# Altium PCB 10-DigitalToAnalogConvert.PcbDoc
Units mm, origin at the board's own origin, x right, y up, seen from the top; angles counter-clockwise.
Board outline 40 x 40 mm, 4 copper layers (Top Layer, Internal Plane 1, Internal Plane 2, Bottom Layer), stack 0.462 mm thick; 33 components, 33 nets, 108 pads, 16 vias.
Unrouted connection lines stored in the file: 62.
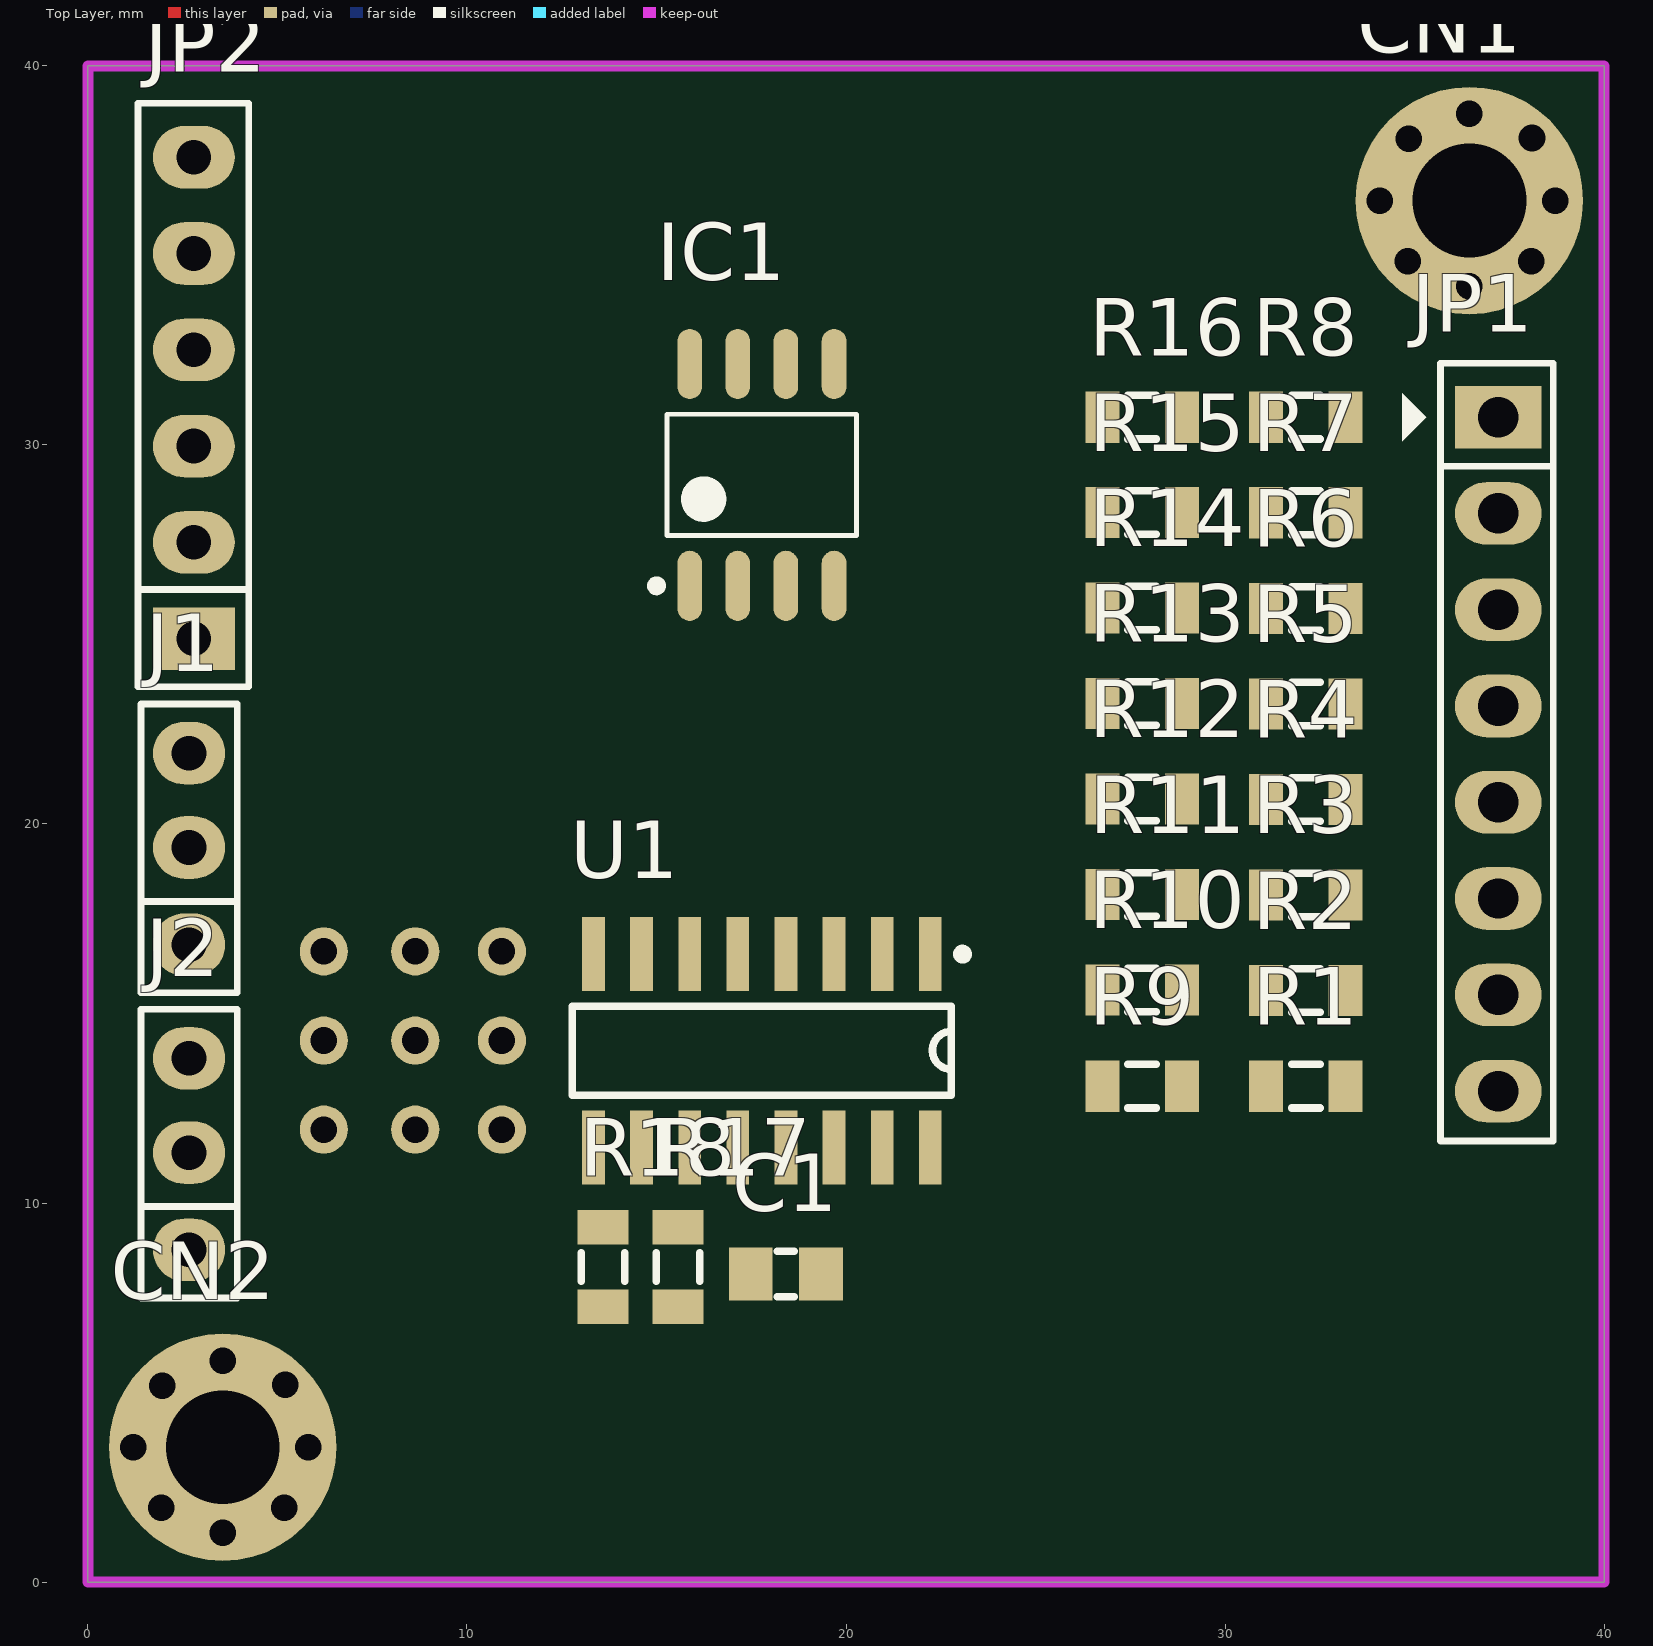
[diagram p0: Top Layer view]
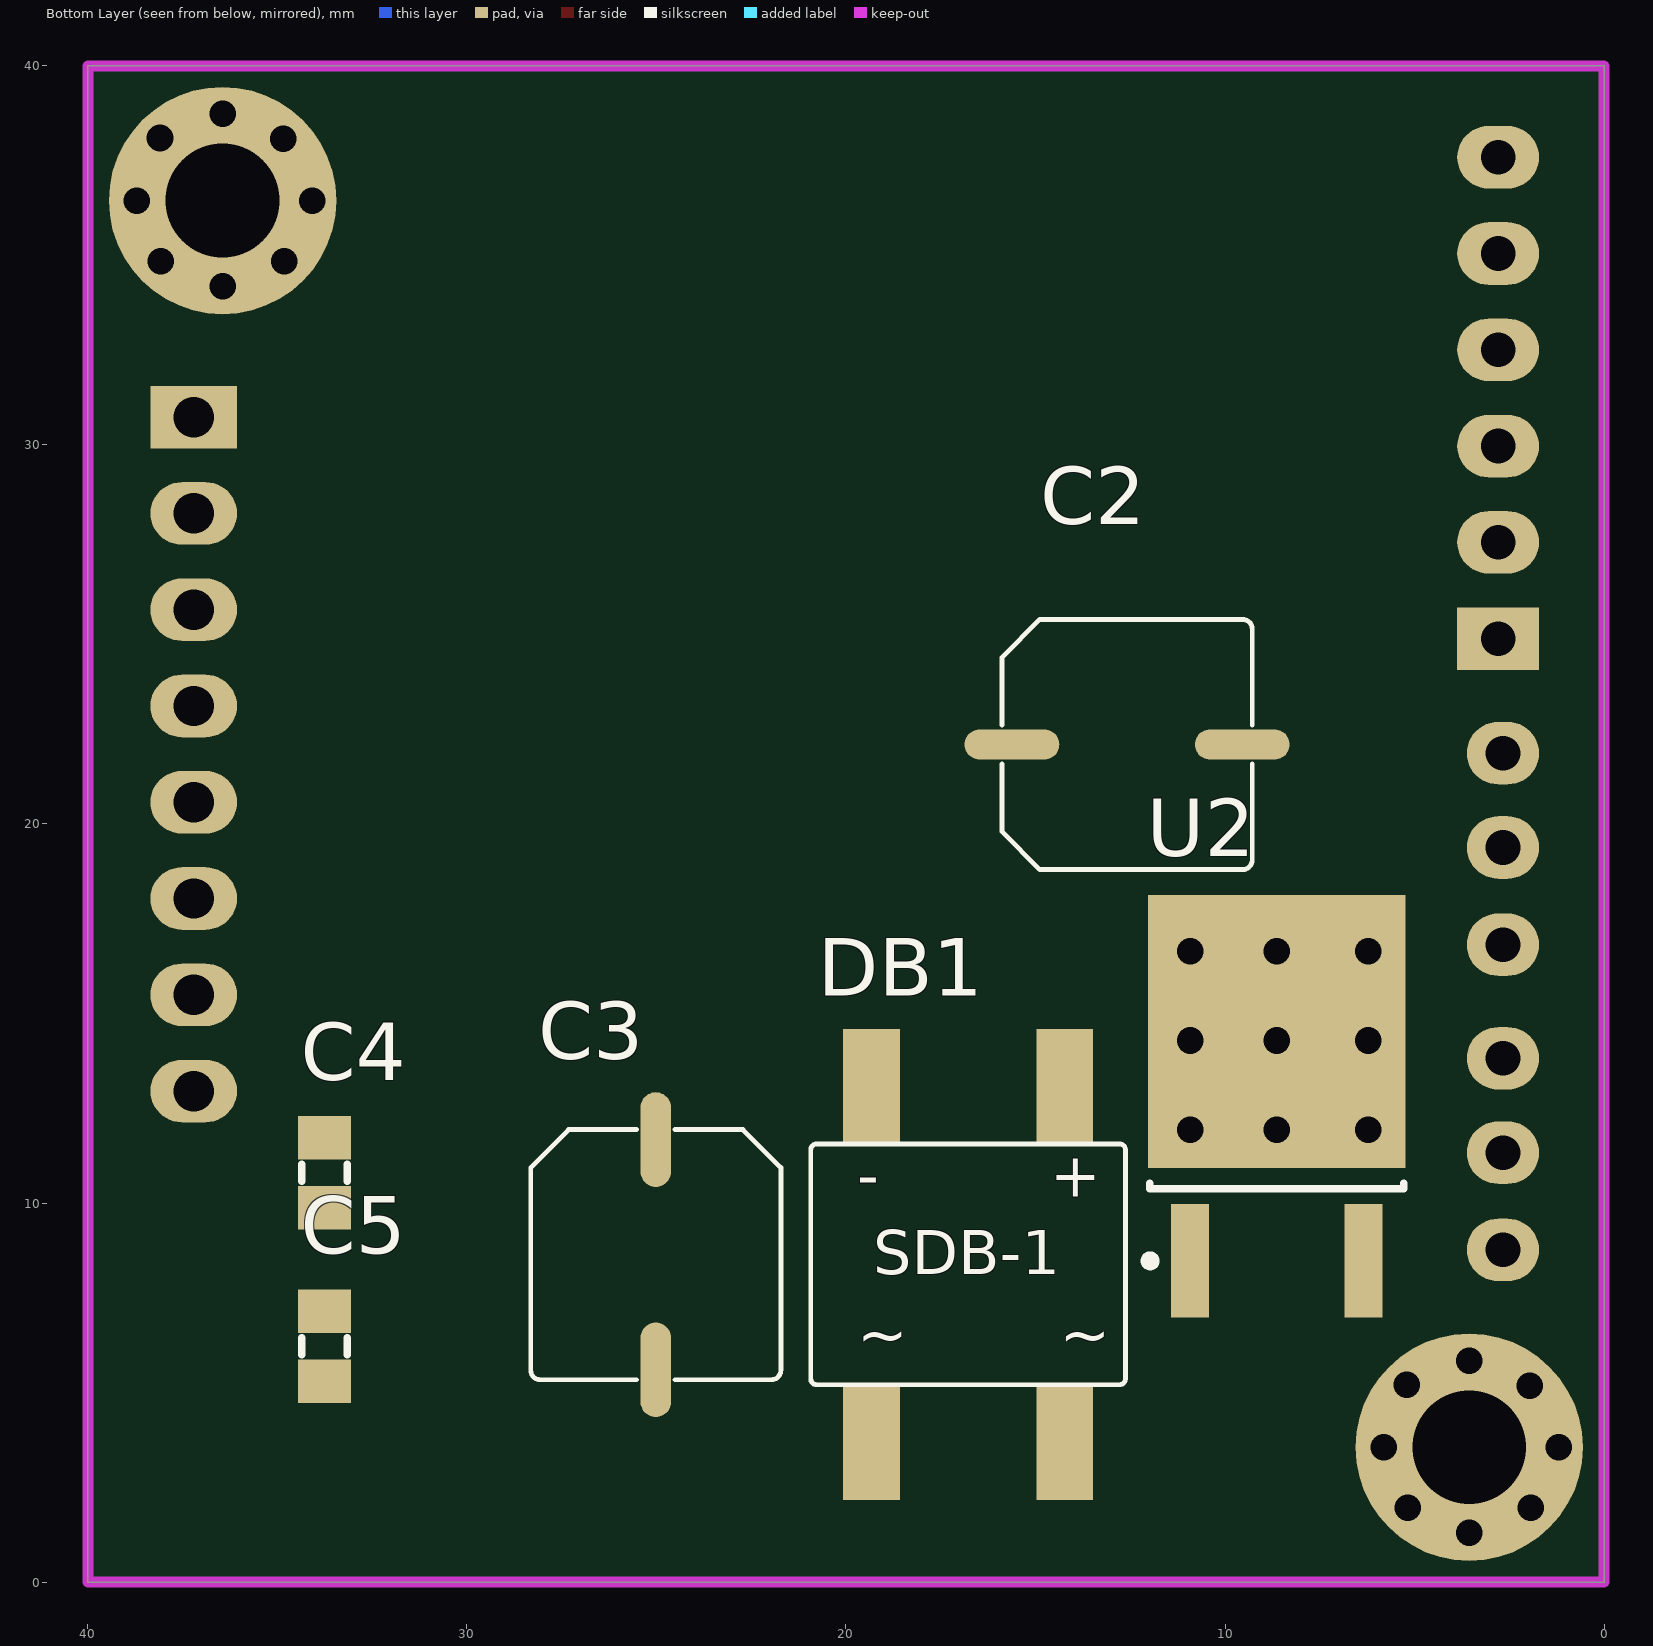
[diagram p1: Bottom Layer view, seen from below]
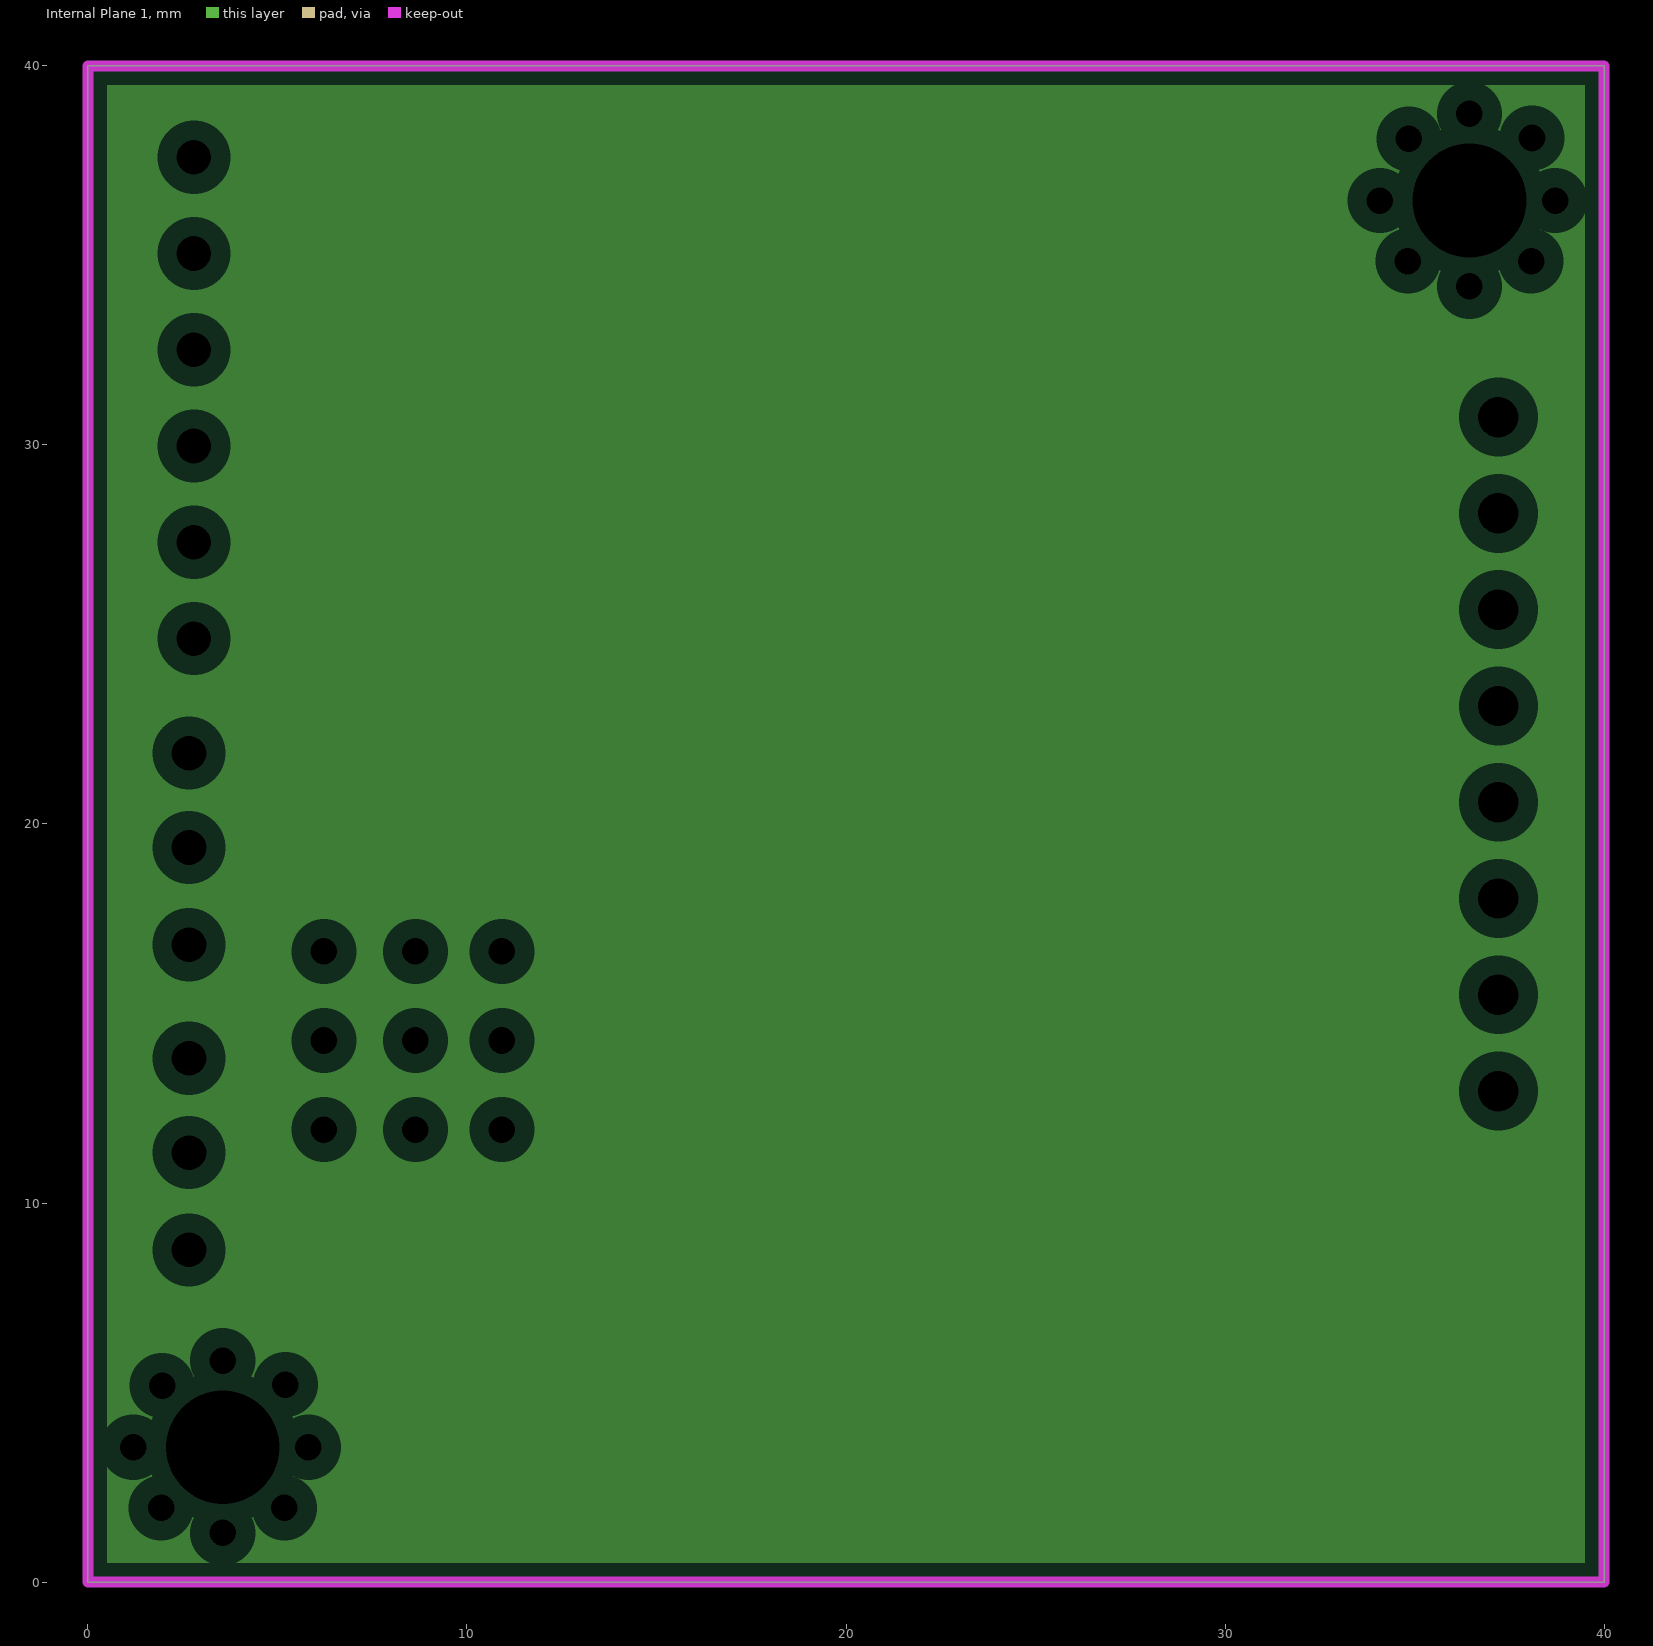
[diagram p2: Internal Plane 1, clearances drawn from the general rule]
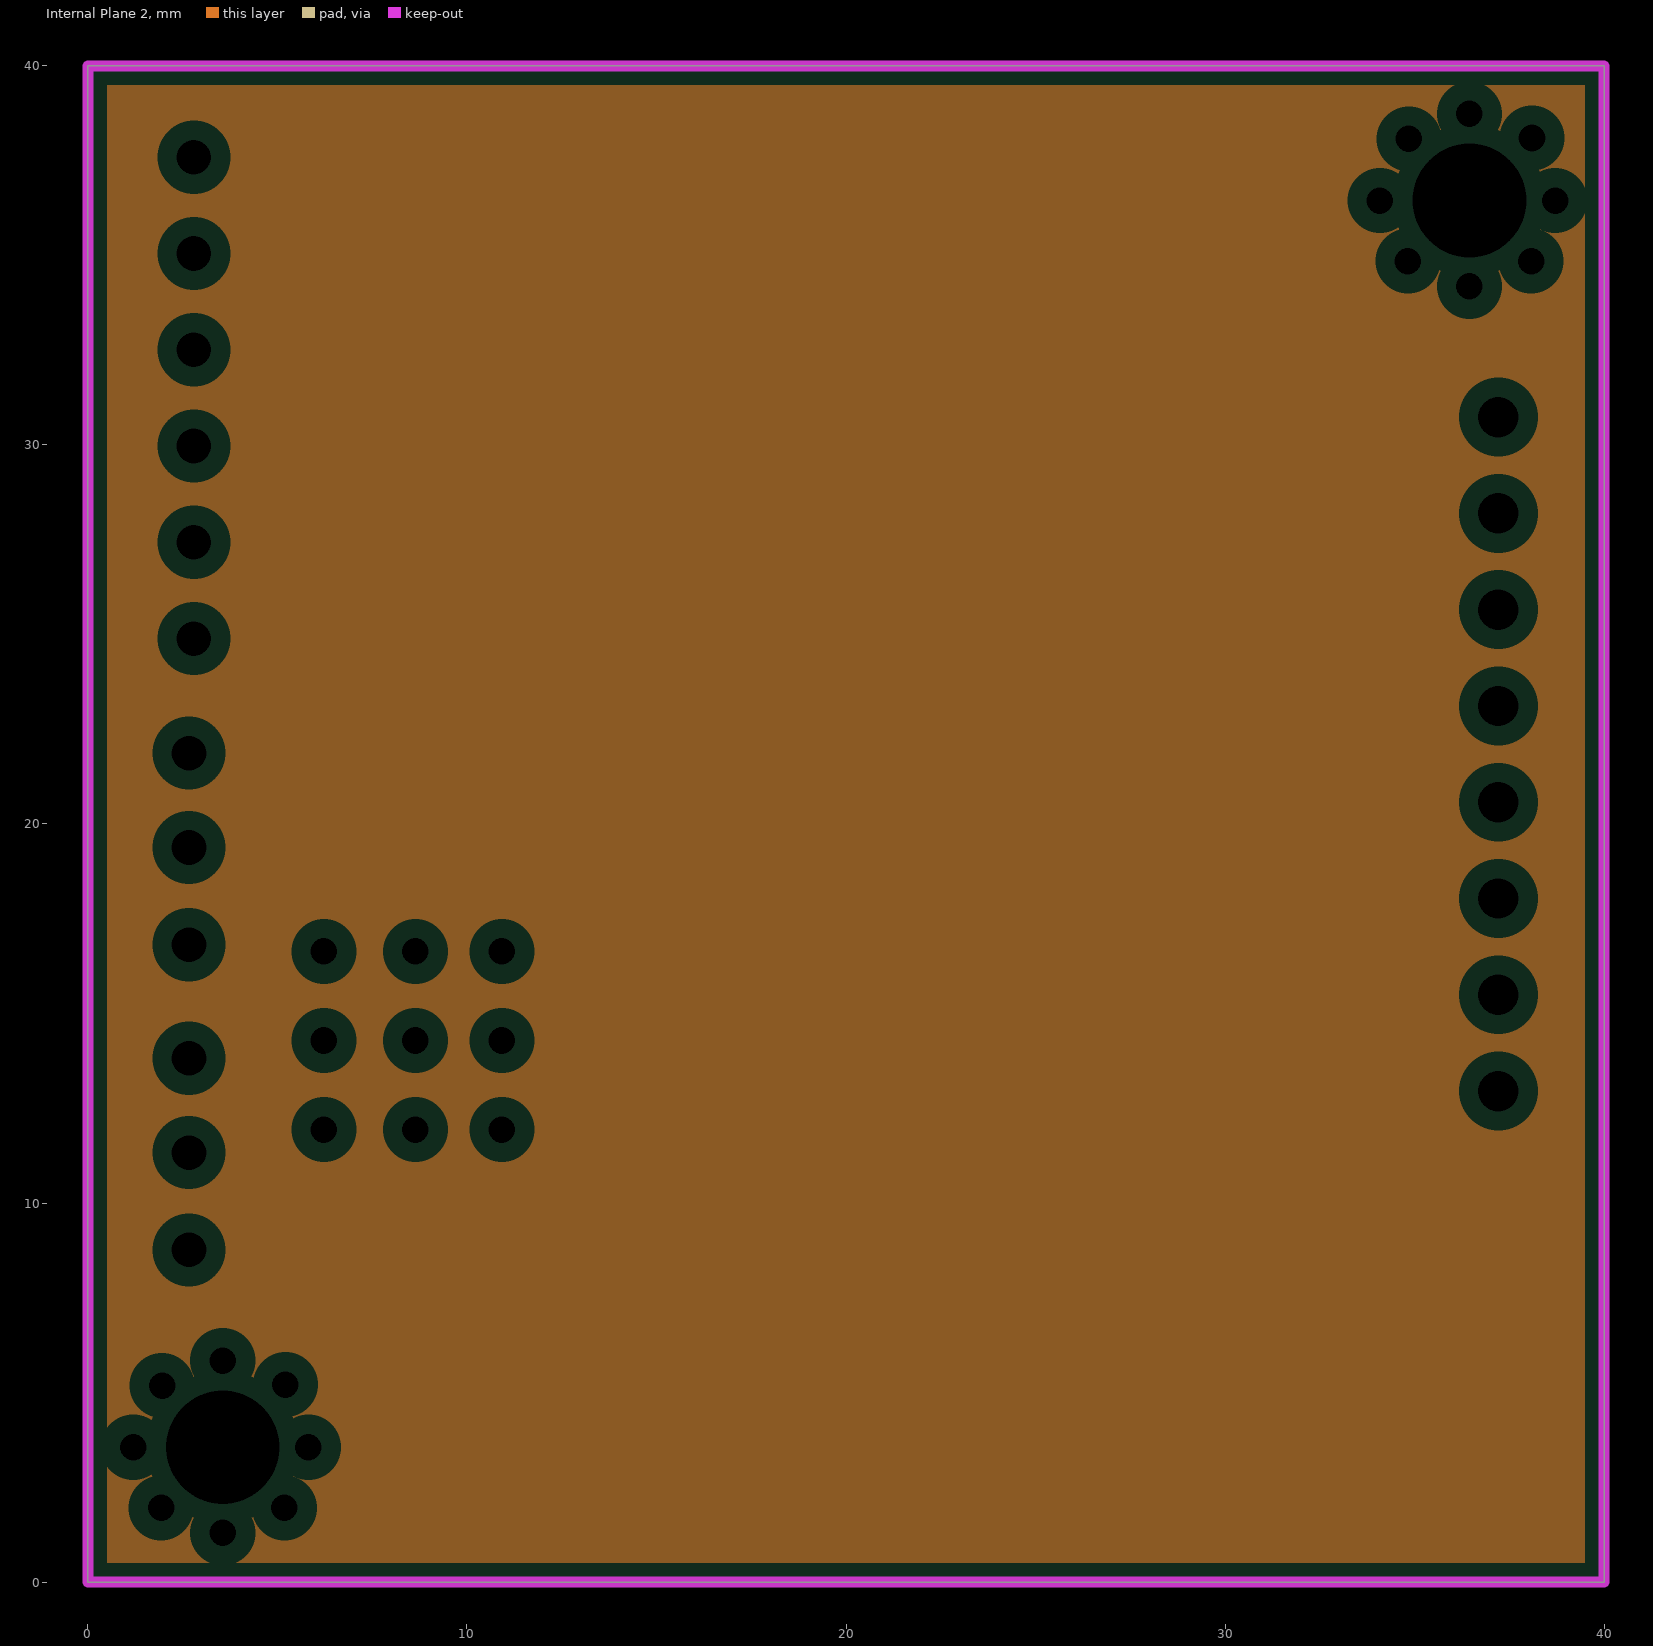
[diagram p3: Internal Plane 2, clearances drawn from the general rule]

## Layer stack, top to bottom
Top Solder: solder mask 0.0102, Solder Resist, Dk 3.5
Top Layer: signal copper 0.0356
Internal Plane 1: plane copper 0.0356
Internal Plane 2: plane copper 0.0356
Dielectric 1: dielectric 0.32, FR-4, Dk 4.8
Bottom Layer: signal copper 0.0356
Bottom Solder: solder mask 0.0102, Solder Resist, Dk 3.5

## Board outline
0,0 0,40 40,40 40,0

## Design rules (kind name [scope] priority, off if disabled: settings)
Clearance [All] p1: gap=0.2
PlaneClearance [All] p1: clearance=0.508
PlaneConnect [All] p1: planeconnectstyle=Relief reliefexpansion=0.508 reliefentries=4 reliefconductorwidth=0.254 reliefairgap=0.254
PolygonConnect [All] p1: connectstyle=Relief reliefconductorwidth=0.254 reliefentries=4 polygonreliefangle="90 Angle" airgapwidth=0.254
RoutingVias [All] p1: holewidth=0.7 width=1 viastyle="Through Hole" minholewidth=0.7 minwidth=1 maxholewidth=0.7 maxwidth=1
SolderMaskExpansion [All] p1: expansion=0.102
Width [All] p1: maxlimit=0.2 minlimit=0.2 preferedwidth=0.2
28 further rules are at their usual default settings.

## Components (designator, comment, footprint, x,y, rotation, side; value= is the part's Value field where it differs from the comment)
C1 "104" C-0805 18.415,8.128 r0 top
C2 "470uF" C-ALU-D6.5 12.583,22.098 r90 bottom
C3 "470uF" C-ALU-D6.5 25.019,8.636 r180 bottom
C4 "104" C-0805 33.755,10.795 r270 bottom
C5 "104" C-0805 33.755,6.223 r270 bottom
CN1 "VIN1" M3 36.449,36.449 r0 top
CN2 "VIN2" M3 3.556,3.556 r0 top
DB1 "Diode Brideg" D-DB-1A-SMD 16.779,8.382 r180 bottom
IC1 "LM358" SOP-8 17.78,29.21 r90 top
J1 "IC_ADRR" JP3 2.667,19.355 r90 top
J2 "TWO_WIRE" JP3 2.667,11.303 r90 top
JP1 "DIGI_IN" JP8 37.211,30.734 r270 top
JP2 "ANALOG" JP6 2.794,24.892 r90 top
R1 "20K" R-0805 32.131,13.081 r180 top
R2 "20K" R-0805 32.131,15.603 r180 top
R3 "20K" R-0805 32.131,18.125 r180 top
R4 "20K" R-0805 32.131,20.647 r180 top
R5 "20K" R-0805 32.131,23.168 r180 top
R6 "20K" R-0805 32.131,25.69 r180 top
R7 "20K" R-0805 32.131,28.212 r180 top
R8 "20K" R-0805 32.131,30.734 r180 top
R9 "20K" R-0805 27.813,13.081 r0 top
R10 "10K" R-0805 27.813,15.621 r0 top
R11 "10K" R-0805 27.813,18.14 r0 top
R12 "10K" R-0805 27.813,20.659 r0 top
R13 "10K" R-0805 27.813,23.177 r0 top
R14 "10K" R-0805 27.813,25.696 r0 top
R15 "10K" R-0805 27.813,28.215 r0 top
R16 "10K" R-0805 27.813,30.734 r0 top
R17 "10K" R-0805 15.563,8.311 r90 top
R18 "10K" R-0805 13.589,8.311 r90 top
U1 "PCF8591T" SO-16 17.78,14.016 r270 top
U2 "ASM1117" TO-252 8.636,12.573 r90 bottom

## Footprints (in the part's own frame and the unit in brackets; to place one, negate y for a bottom-side part, rotate by r counter-clockwise, add the part's x,y. Pads: shape width x height; smd on the part's side, far side on the other; paste and mask are expansions set on the pad)
C-0805 [mm] "Chip Capacitor, 2-Leads, Body 2.0x1.3mm, IPC Medium Density"
  rect 1.15x1.4 smd: 1(-0.925,0) 2(0.925,0)
  silkscreen extent -0.23,-0.6 0.23,0.6, body extent -1,-0.63 1,0.63, height 0.5
C-ALU-D6.5 [mm] "6.3x5.4mm"
  oval 0.8x2.5 smd: 1(0,3.038) 2(0,-3.038)
  silkscreen extent -3.3,-3.3 3.3,3.3, body extent -3.3,-3.8 3.3,3.8, height 6.25
D-DB-1A-SMD [mm] "DB106S"
  rect 1.5x3 smd: 1(-2.55,-4.713) 2(2.55,-4.713) 3(2.55,4.713) 4(-2.55,4.713)
  silkscreen extent -4.15,-3.18 4.15,3.18, body extent -4.15,-4.95 4.15,4.95, height 3.35
JP3 [mil] "Jumper 3"
  oval 65x75 hole 36: 1(-100,0) 2(1,0) 3(99,0)
  silkscreen extent -150,-50 150,50, body extent -150,-60 150,55, height 355
JP6 [mil] "JP6"
  rect 65x85 hole 36: 1(0,0)
  oval 65x85 hole 36: 2(100,0) 3(200,0) 4(300,0) 5(400,0) 6(500,0)
  silkscreen extent -50,-57 556,58, body extent -48,-50 548,48, height 323
JP8 [mil] "JP8"
  rect 65x90 hole 42: 1(0,0)
  oval 65x90 hole 42: 2(100,0) 3(200,0) 4(300,0) 5(400,0) 6(500,0) 7(600,0) 8(700,0)
  silkscreen extent -56,-100 752,57, body extent -48,-50 748,48, height 323
M3 [mm]
  round 6 hole 3: 1(0,0)
R-0805 [mm] "Chip Resistor, 2-Leads, Body 2.0x1.3mm, IPC Medium Density"
  rect 0.9x1.35 smd: 1(-1.05,0) 2(1.05,0)
  silkscreen extent -0.38,-0.58 0.38,0.58, body extent -1,-0.63 1,0.63, height 0.5
SO-16 [mm] "SODVWLF VPDOO RXWOLQH SDFNDJH     OHDGV  ERG\ ZLGWK     PP"
  rect 1.95x0.6 smd: 1(-2.55,4.445) 2(-2.55,3.175) 3(-2.55,1.905) 4(-2.55,0.635) 5(-2.55,-0.635) 6(-2.55,-1.905) 7(-2.55,-3.175) 8(-2.55,-4.445) 9(2.55,-4.445) 10(2.55,-3.175) 11(2.55,-1.905) 12(2.55,-0.635) 13(2.55,0.635) 14(2.55,1.905) 15(2.55,3.175) 16(2.55,4.445)
  silkscreen extent -2.67,-5 1.17,5.42, body extent -3,-4.95 3,4.95, height 1.4
SOP-8 [mm] "SOP, 8-Leads, Body 4.90x3.90mm, Pitch 1.27mm, IPC Low Density"
  oval 1.85x0.65 smd: 1(-2.925,1.905) 2(-2.925,0.635) 3(-2.925,-0.635) 4(-2.925,-1.905) 5(2.925,-1.905) 6(2.925,-0.635) 7(2.925,0.635) 8(2.925,1.905)
  silkscreen extent -3.05,-2.5 1.6,2.9, body extent -3,-2.5 3,2.5, height 1.75
TO-252 [mm] "AMS1117"
  rect 3x1 smd: 1(-4.1,2.29) 3(-4.1,-2.29)
  round 1.27 hole 0.7: 2(-0.635,-2.413) 2(-0.635,0) 2(-0.635,2.286) 2(1.714,-2.413) 2(1.714,0) 2(1.714,2.286) 2(4.064,-2.413) 2(4.064,0) 2(4.064,2.286)
  rect 7.2x6.8 smd: 2(1.95,0)
  silkscreen extent -4.22,-3.35 -2.05,3.47, body extent -4.55,-3.38 5.35,3.37, height 2.39

## Part data
C1 C4 C5: library part CN
C2 C3: library part CP1, "Cap P  0,1uF < 22uF , 16 - 50V"
CN1 CN2: library part COCDONGM3
DB1: library part DB, "Convert AC to DC voltage, 4 pin"
IC1: "Low-Power Dual Operational Amplifier"
J1 J2: library part JP3, "Jumper 3"
JP1: library part JP8, "JP8 PIN"
JP2: library part JP6, "JP6 PIN"
R1 R2 R3 R4 R5 R6 R7 R8 R9 R10 R11 R12 R13 R14 R15 R16 R17 R18: library part R, "Resistor 1/4W"

## Via types
v1: diameter 1, hole 0.7, Top Layer to Bottom Layer, 16 vias

## Nets (pads, with @x,y where several pads share a name; then routed paths per layer and width w, separated by ;. In a path a pad name is that pad's centre, name@x,y a point inside that pad or via, vN(x,y) a via of type N, cw(c..) or ccw(c..) an arc to the next point about the centre after c; other vN are vias at no path point)
+5V: C3.1 C5.2 IC1.8 R9.1 R17.1 R18.1 U1.16 U2.2
+12V: C2.1 C4.2 DB1.3 U2.3
A_OUT_IC: JP2.1 U1.15
A_OUT_R2R: IC1.1 IC1.2 JP2.2
BIT0: JP1.8 R1.1
BIT1: JP1.7 R2.1
BIT2: JP1.6 R3.1
BIT3: JP1.5 R4.1
BIT4: JP1.4 R5.1
BIT5: JP1.3 R6.1
BIT6: JP1.2 R7.1
BIT7: JP1.1 R8.1
GND: C1.1 C2.2 C3.2 C4.1 C5.1 DB1.4 IC1.4 J2.1 U1.8 U1.12 U1.13 U2.1
NetCN1_1: CN1.1 DB1.2
  other v1: 36.449,34.188 34.823,34.849 38.075,34.849 34.087,36.449 38.71,36.449 34.849,38.075 38.1,38.1 36.449,38.735
NetCN2_1: CN2.1 DB1.1
  other v1: 3.556,1.295 1.93,1.956 5.182,1.956 1.194,3.556 5.817,3.556 1.956,5.182 5.207,5.207 3.556,5.842
NetIC1_3: IC1.3 R8.2 R16.2
NetJ1_1: J1.1 U1.7
NetJ1_2: J1.2 U1.6
NetJ1_3: J1.3 U1.5
NetJP2_3: JP2.3 U1.4
NetJP2_4: JP2.4 U1.3
NetJP2_5: JP2.5 U1.2
NetJP2_6: JP2.6 U1.1
NetR1_2: R1.2 R9.2 R10.1
NetR2_2: R2.2 R10.2 R11.1
NetR3_2: R3.2 R11.2 R12.1
NetR4_2: R4.2 R12.2 R13.1
NetR5_2: R5.2 R13.2 R14.1
NetR6_2: R6.2 R14.2 R15.1
NetR7_2: R7.2 R15.2 R16.1
SCL: J2.3 R17.2 U1.10
SDA: J2.2 R18.2 U1.9
VREF: C1.2 U1.14
pads on no net: IC1.5 IC1.6 IC1.7 U1.11

## Keep-outs
Keep-Out Layer:
  the board outline again, w0.3

## Text inside footprints (layer, text, board x,y; h text height)
DB1: Bottom Overlay "SDB-1" at 19.286,7.742 h2; Bottom Overlay "-         +" at 19.7,9.779 h2; Bottom Overlay "~        ~" at 19.7,5.588 h2